# Altium PCB PCB2.PcbDoc
Units mm, origin at the board's own origin, x right, y up, seen from the top; angles counter-clockwise.
Board outline 66.7 x 71.4 mm, 2 copper layers (Top Layer, Bottom Layer); 61 components, 60 nets, 263 pads, 245 vias.
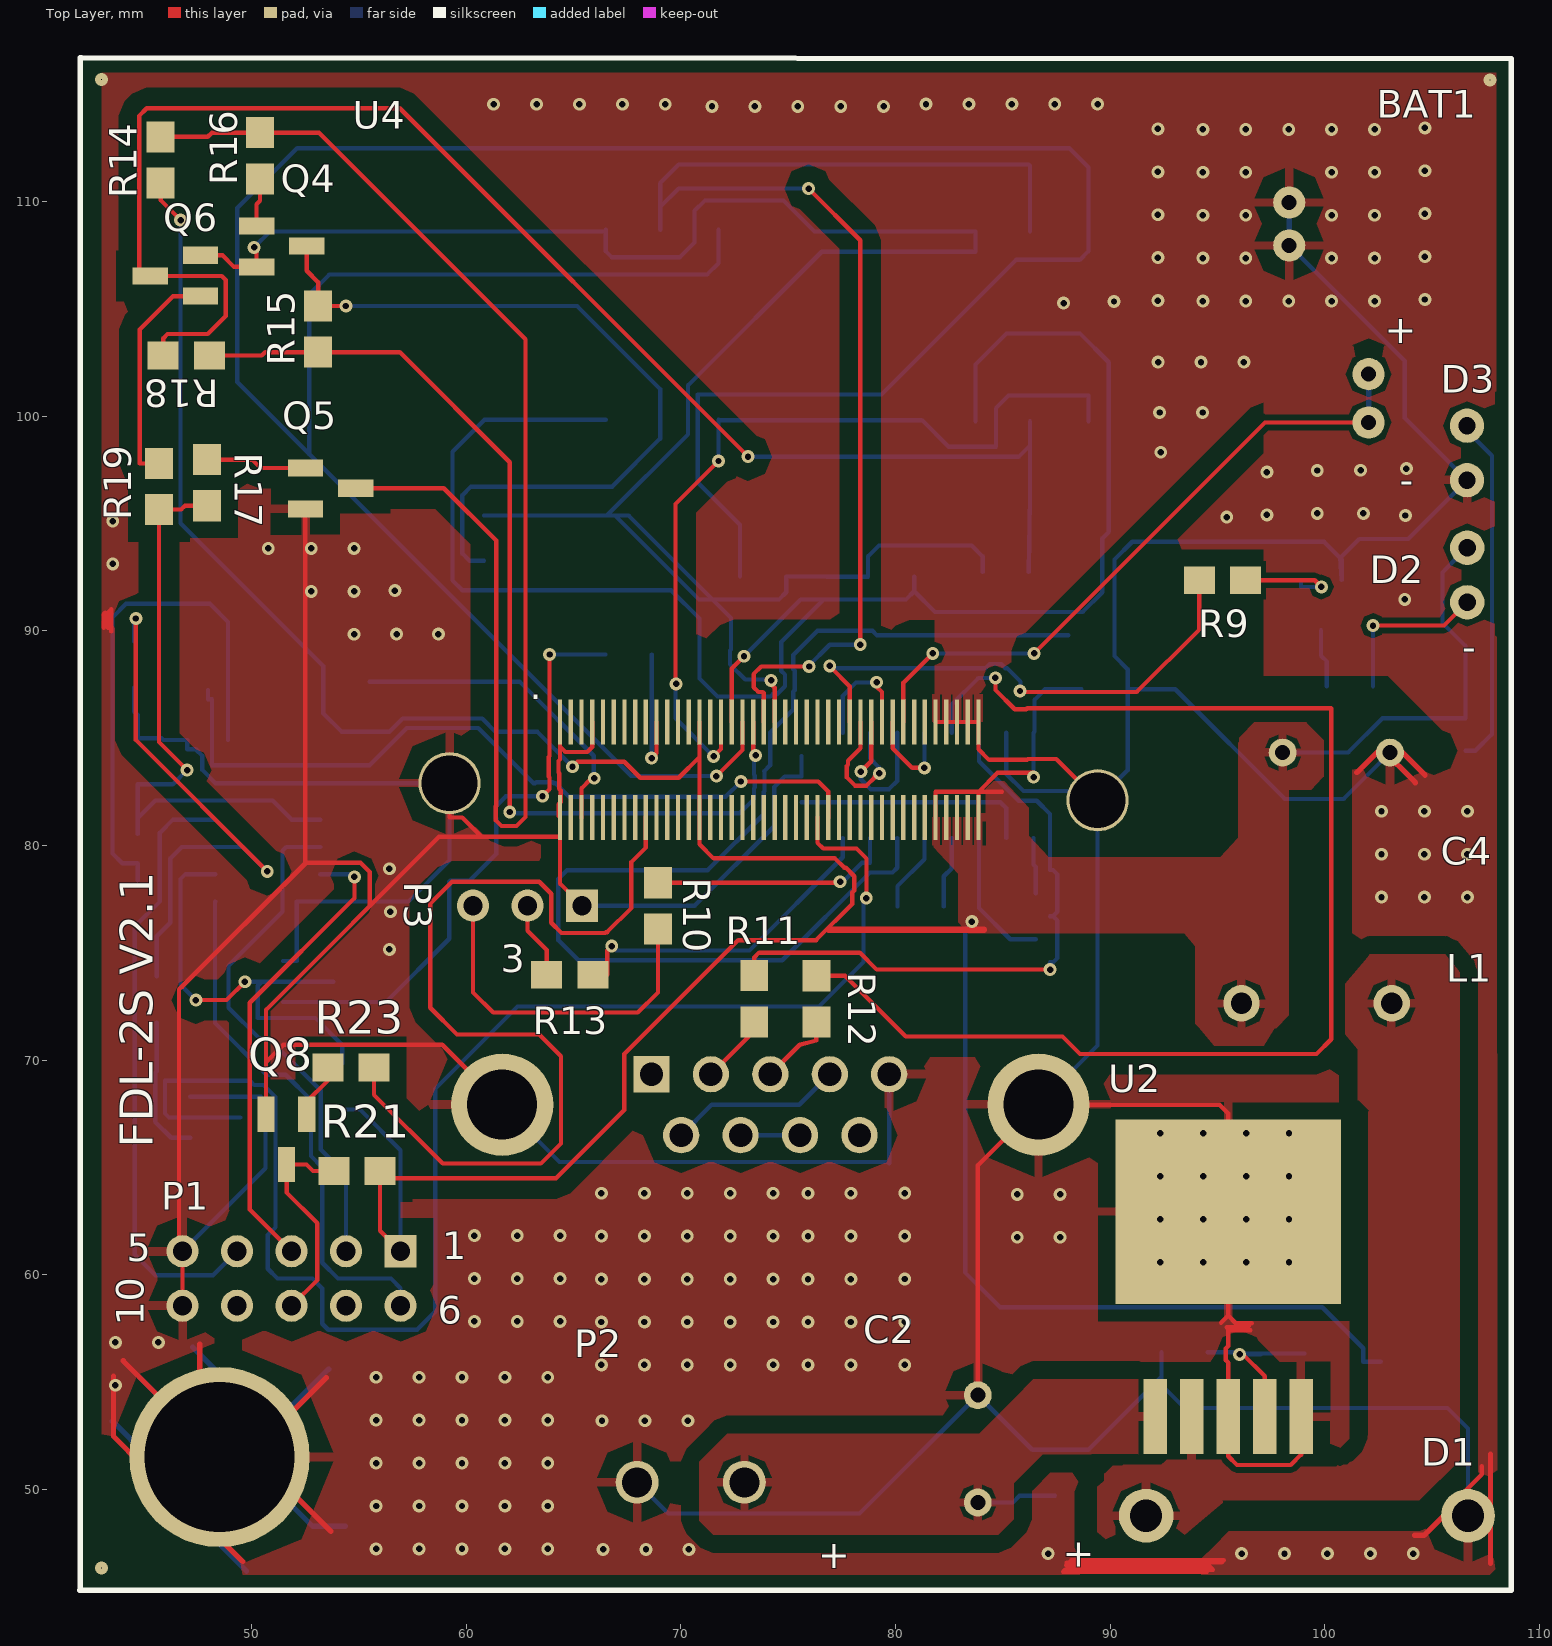
[diagram p0: Top Layer view]
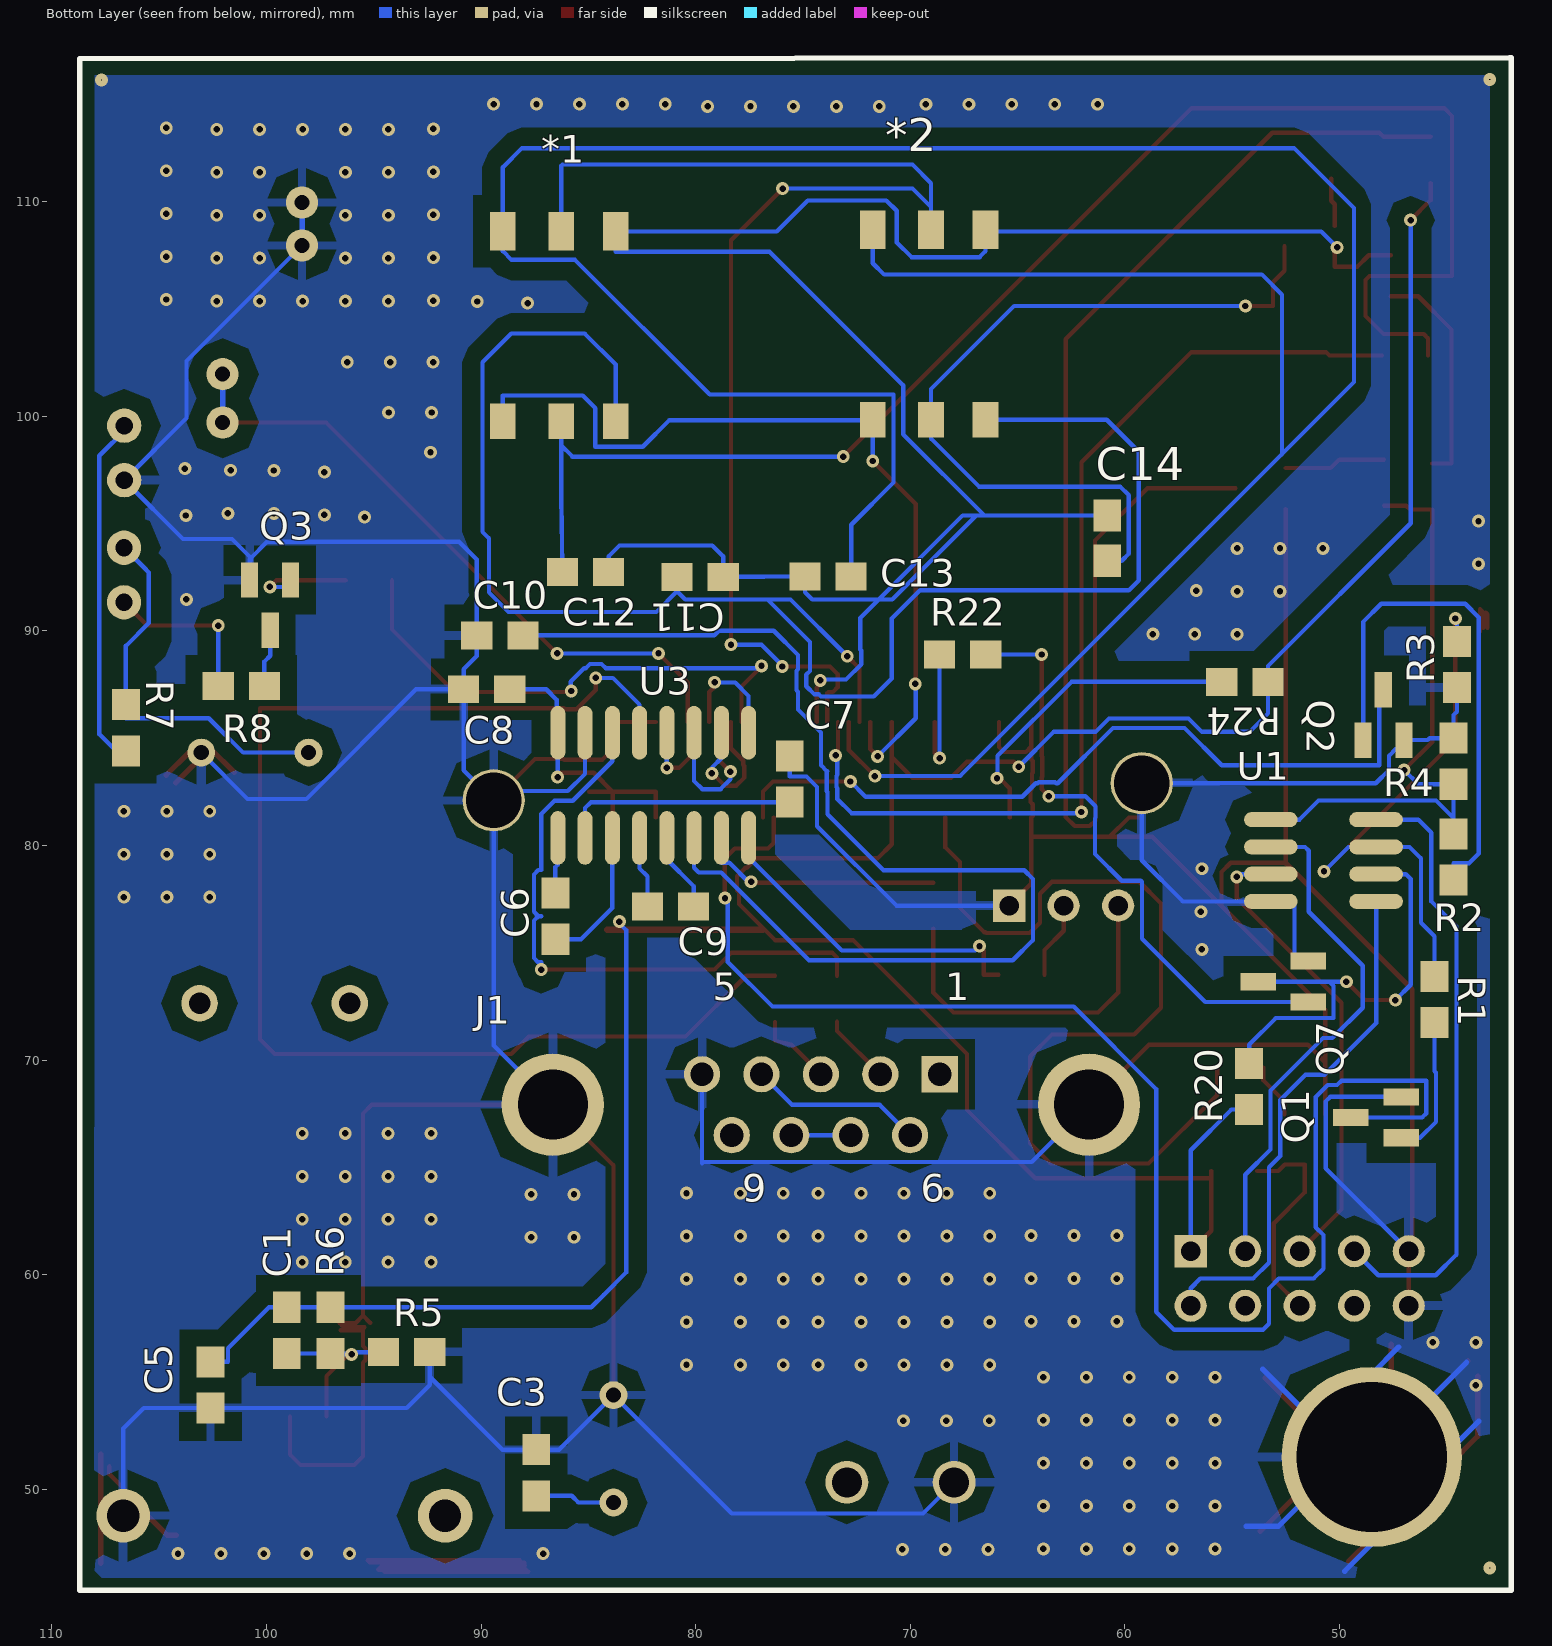
[diagram p1: Bottom Layer view, seen from below]

## Layer stack, top to bottom
Top Layer: signal copper 0.0356
Dielectric: dielectric 0.32, FR-4, Dk 4.8
Bottom Layer: signal copper 0.0356

## Board outline
42,45.323 42,116.702 108.666,116.702 108.7,116.668 108.7,45.3

## Design rules (kind name [scope] priority, off if disabled: settings)
Clearance Clearance_11 [InNamedPolygon('Bootm-GND') Or  InNamedPolygon('Top Layer-GND')] p1: gap=0.6
Clearance Clearance_10 [InNamedPolygon('Top Layer-GND')] p2: gap=0.6
Clearance Clearance_9 [InNamedPolygon('Bootom-GND')] p3: gap=0.6
Clearance Clearance_8 [InNamedPolygon('Top Layer-GND')] p4: gap=0.6
Clearance Clearance_7 [InNamedPolygon('Bottom-GND')] p5: gap=0.6
Clearance Clearance_6 [InNamedPolygon('gnd_top')] p6: gap=0.6
Clearance Clearance_5 [InNamedPolygon('Top Layer-No Net')] p7: gap=0.6
Clearance Clearance_4 [InNamedPolygon('Top Layer-No Net') Or  InNamedPolygon('Top Layer-No Net')] p8: gap=0.6
Clearance Clearance_2 [InNamedPolygon('TopGnd')] p9: gap=0.5
Clearance Clearance_1 [InNamedPolygon('BottomGND')] p10: gap=0.5
Clearance Clearance_3 [InNamedPolygon('Top Layer-No Net') Or  InNamedPolygon('Top Layer-No Net')] p11: gap=0.5
Clearance [All] p12: gap=0.25
PlaneClearance [All] p1: clearance=0.808
PlaneConnect PlaneConnect_1 [InNet('GND')] p1: planeconnectstyle=Direct reliefexpansion=0.508 reliefentries=4 reliefconductorwidth=0.254 reliefairgap=0.254
PlaneConnect [All] p2: planeconnectstyle=Relief reliefexpansion=0.508 reliefentries=4 reliefconductorwidth=0.254 reliefairgap=0.254
PolygonConnect PolygonConnect_2 [All vs IsNamedPolygon('Bottom-GND')] p1: connectstyle=Relief reliefconductorwidth=0.254 reliefentries=4 polygonreliefangle="90 Angle"
PolygonConnect PolygonConnect_1 [All vs IsNamedPolygon('Top Layer-No Net') Or  IsNamedPolygon('Top Layer-No Net')] p2: connectstyle=Relief reliefconductorwidth=0.4 reliefentries=4 polygonreliefangle="90 Angle"
PolygonConnect [All] p3: connectstyle=Relief reliefconductorwidth=0.4 reliefentries=4 polygonreliefangle="90 Angle"
RoutingVias [All] p1: holewidth=0.3 width=0.5 viastyle="Through Hole" minholewidth=0.3 minwidth=0.5 maxholewidth=10.5 maxwidth=10.7
SMDNeckDown [All] p1 off: percent=10.000
SilkToSilkClearance [All] p1: silktosilkclearance=0.1
SilkscreenOverComponentPads [All] p1: minsilkscreentomaskgap=0.254
SolderMaskExpansion [All] p1: expansion=0.102
Width [All] p1: maxlimit=4 minlimit=0.15 preferedwidth=0.2
24 further rules are at their usual default settings.

## Classes and differential pairs
component class 12F629: BAT1 P1 Q1 Q2 R1 R2 R3 R4 U1
component class fonte_nova: C1 C2 C3 C4 C5 D1 D2 D3 L1 P2 Q3 R5 R6 R7 R8 R9 U2
component class MAX3232: C6 C7 C8 C9 C10 J1 P3 R10 R11 R12 R13 U3
component class TC65: R24 U4
component class SIMLOCK: *1 *2 C11 C12 C13 C14 Q4 Q5 Q6 Q7 Q8 R14 R15 R16 R17 R18 R19 R20 R21 R22 R23

## Components (designator, comment, footprint, x,y, rotation, side; value= is the part's Value field where it differs from the comment)
*1 "SIMLOCK2" SIMLOCK_NOVO 87.63,104.191 r0 bottom
*2 "SIMLOCK2" SIMLOCK_NOVO 70.394,104.262 r0 bottom
BAT1 "CR2032V" "BAT-CR2032 V" 100.198,104.963 r90 top
C1 "Cap" 0805L 99.06,57.404 r90 bottom
C2 "Cap2" Capacitor470/35V 83.835,49.383 r90 top
C3 "Cap" 0805L 87.432,50.77 r270 bottom
C4 "Cap2" Capacitor470/35V 98.044,84.328 r0 top
C5 "Cap" 0805L 102.616,54.864 r90 bottom
C6 "Cap" 0805L 86.543,76.703 r90 bottom
C7 "Cap" 0805L 75.621,83.094 r270 bottom
C8 "Cap" 0805L 89.743,87.279 r180 bottom
C9 "Cap" 0805L 81.173,77.16 r0 bottom
C10 "Cap" 0805L 89.131,89.791 r180 bottom
C11 "Cap" 0805L 79.797,92.517 r0 bottom
C12 "Cap" 0805L 85.136,92.74 r0 bottom
C13 "Cap" 0805L 73.833,92.537 r180 bottom
C14 "Cap" 0805 60.823,94.32 r270 bottom
D1 "1N5822" Diode-1N5822 106.68,48.768 r180 top
D2 "LED1" LED-1 106.644,92.603 r0 top
D3 "LED1" LED-1 106.634,98.293 r0 top
J1 "D Connector 9" DB9 74.168,58.42 r0 bottom
L1 "Inductor" "Indutor MCLEOD" 103.124,72.644 r180 top
P1 "Header 5X2A" HDR2X5_CEN 56.937,61.092 r180 top
P2 "Header 2" KRE 67.958,50.325 r0 top
P3 "Header 3" HDR1X3 65.395,77.196 r180 top
Q1 "NPN" SOT-23V2 48.301,67.32 r0 bottom
Q2 "NPN" SOT-23V2 47.96,86.081 r90 bottom
Q3 "NPN" SOT-23V2 99.832,91.201 r270 bottom
Q4 "NPN" SOT-23V2 51.394,107.93 r0 top
Q5 "NPN" SOT-23V2 53.675,96.647 r0 top
Q6 "NPN" SOT-23V2 46.446,106.538 r180 top
Q7 "NPN" SOT-23V2 52.629,73.65 r0 bottom
Q8 "NPN" SOT-23V2 51.628,66.304 r270 top
R1 "Res Semi" 0805L 45.573,72.827 r90 bottom
R2 "Res Semi" 0805L 44.689,79.461 r90 bottom
R3 "Res Semi" 0805L 44.531,88.433 r90 bottom
R4 "Res Semi" 0805L 44.689,83.927 r270 bottom
R5 "Res Semi" 0805L 93.472,56.388 r0 bottom
R6 "Res Semi" 0805L 97.028,57.404 r90 bottom
R7 "Res Semi" 0805L 106.558,85.486 r90 bottom
R8 "Res Semi" 0805L 101.178,87.427 r0 bottom
R9 "Res Semi" 0805L 95.235,92.359 r180 top
R10 "Res Semi" 0805L 68.931,77.191 r270 top
R11 "Res Semi" 0805L 73.416,72.857 r90 top
R12 "Res Semi" 0805L 76.312,72.852 r90 top
R13 "Res Semi" 0805L 64.821,73.975 r180 top
R14 "Res Semi" 0805L 45.756,111.948 r270 top
R15 "Res Semi" 0805L 53.096,104.064 r270 top
R16 "Res Semi" 0805L 50.389,112.141 r270 top
R17 "Res Semi" 0805L 47.925,96.906 r90 top
R18 "Res Semi" 0805L 46.949,102.829 r0 top
R19 "Res Semi" 0805L 45.679,96.728 r90 top
R20 "Res Semi" 0805L 54.214,68.768 r270 bottom
R21 "Res Semi" 0805L 54.905,64.831 r0 top
R22 "Res Semi" 0805L 67.564,88.9 r180 bottom
R23 "Res Semi" 0805L 54.625,69.657 r180 top
R24 "Res Semi" 0805L 54.412,87.625 r180 bottom
U1 "PIC12F629-I/SN" SOIC-SN8_M 50.749,79.299 r0 bottom
U2 "LM2596S-ADJ" TS5B_M 95.504,59.436 r90 top
U3 "MAX3232ESE" NSO16_M 81.984,82.8 r90 bottom
U4 "TC65_SCH" TC65iV3 83.868,122.904 r270 top

## Footprints (in the part's own frame and the unit in brackets; to place one, negate y for a bottom-side part, rotate by r counter-clockwise, add the part's x,y. Pads: shape width x height; smd on the part's side, far side on the other; paste and mask are expansions set on the pad)
0805 [mm] "Chip Resistor, Body 2.0x1.3mm, IPC High Density"
  rect 1.5x1.3 smd: 1(-1.054,0) 2(1.051,0)
  body extent -1.07,-0.7 1.07,0.7, height 2.54
0805L [mm] "Chip Resistor, Body 2.0x1.3mm, IPC High Density"
  rect 1.45x1.3 smd: 1(-1.075,0) 2(1.075,0)
  body extent -1.07,-0.7 1.07,0.7, height 2.54
"BAT-CR2032 V" [mm] "CR 2032 Vertical"
  round 1.5 hole 0.7: 1(3,1.85) 1(5,1.85) 2(-5.25,-1.85) 2(-3,-1.85)
  Bottom Layer lines w0.254: 3,1.85 5,1.85 ; -5.25,-1.85 -3,-1.85
Capacitor470/35V [mm]
  round 1.3 hole 0.7: 1(0,0) 2(5,0)
DB9 [mm] "Connector; D Subminiature; 9 Position; Right Angle; Pitch 1.385 mm"
  rect 1.69x1.69 hole 1.09: 1(-5.54,-10.92)
  round 1.69 hole 1.09: 2(-2.77,-10.92) 3(0,-10.92) 4(2.77,-10.92) 5(5.54,-10.92) 6(-4.155,-8.08) 7(-1.385,-8.08) 8(1.385,-8.08) 9(4.155,-8.08)
  round 4.76 hole 3.26: 10(-12.495,-9.5) 11(12.495,-9.5)
Diode-1N5822 [mm]
  round 2.5 hole 1.5: 1(0,0)
  oval 2.55x2.5 hole 1.5: 2(15,0)
HDR1X3 [mm] "Connector; Header; 3 Position"
  rect 1.5x1.5 hole 0.9: 1(0,0)
  round 1.5 hole 0.9: 2(2.54,0) 3(5.08,0)
HDR2X5_CEN [mm] "Connector; Header; 5x2 Position"
  rect 1.5x1.5 hole 0.9: 1(0,0)
  round 1.5 hole 0.9: 2(2.54,0) 3(5.08,0) 4(7.62,0) 5(10.16,0) 6(0,2.54) 7(2.54,2.54) 8(5.08,2.54) 9(7.62,2.54) 10(10.16,2.54)
"Indutor MCLEOD" [mm]
  round 1.7 hole 1: 1(0,0) 2(7,0)
KRE [mm]
  round 2 hole 1.4: 1(0,0) 2(5,0)
LED-1 [mm] "Typical RED GaAs LED; 2 Leads"
  round 1.6 hole 0.8: 1(0,1.27) 2(0,-1.27)
NSO16_M [mm] "SOIC, 16-Leads, Body 9.9x3.9mm, Pitch 1.27mm, IPC Low Density"
  oval 2.5x0.7 smd: 1(-2.45,4.445) 2(-2.45,3.175) 3(-2.45,1.905) 4(-2.45,0.635) 5(-2.45,-0.635) 6(-2.45,-1.905) 7(-2.45,-3.175) 8(-2.45,-4.445) 9(2.45,-4.445) 10(2.45,-3.175) 11(2.45,-1.905) 12(2.45,-0.635) 13(2.45,0.635) 14(2.45,1.905) 15(2.45,3.175) 16(2.45,4.445)
  body extent -2,-5 2,5, height 1.75
SIMLOCK_NOVO [mm] "Conector para Simcard"
  rect 1.2x1.65 smd: 1(-3.9,4.425) 2(-1.36,4.425) 3(1.36,4.425)
  rect 1.2x1.8 smd: 4(-3.9,-4.425) 5(-1.36,-4.425) 6(1.36,-4.425)
SOIC-SN8_M [mm] "SOIC, 8-Leads, Body 4.9x3.8mm, Pitch 1.27mm, IPC Low Density"
  oval 2.5x0.7 smd: 1(-2.45,1.905) 2(-2.45,0.635) 3(-2.45,-0.635) 4(-2.45,-1.905) 5(2.45,-1.905) 6(2.45,-0.635) 7(2.45,0.635) 8(2.45,1.905)
  body extent -2,-2.5 2,2.5, height 1.75
SOT-23V2 [mm] "SOT23, 3-Leads, Body 2.9x1.3mm, Pitch 0.95mm, Lead Span 2.4mm, IPC Low Density"
  rect 1.65x0.8 smd: B(-1.168,0.94) C(1.168,0) E(-1.168,-0.965)
  body extent -0.7,-1.5 0.7,1.5, height 1.14
TC65iV3 [mm]
  round 2.9 hole 2.6: 0(40,-24.65) 0(40.8,5.55)
  rect 2.1x0.2 smd: 1(37.149,-19.5) 2(37.149,-19) 3(37.149,-18.5) 4(37.149,-18) 5(37.149,-17.5) 6(37.149,-17) 7(37.149,-16.5) 8(37.149,-16) 9(37.149,-15.5) 10(37.149,-15) 11(37.149,-14.5) 12(37.149,-14) 13(37.149,-13.5) 14(37.149,-13) 15(37.149,-12.5) 16(37.149,-12) 17(37.149,-11.5) 18(37.149,-11) 19(37.149,-10.5) 20(37.149,-10) 21(37.149,-9.5) 22(37.149,-9) 23(37.149,-8.5) 24(37.149,-8) 25(37.149,-7.5) 26(37.149,-7) 27(37.149,-6.5) 28(37.149,-6) 29(37.149,-5.5) 30(37.149,-5) 31(37.149,-4.5) 32(37.149,-4) 33(37.149,-3.5) 34(37.149,-3) 35(37.149,-2.5) 36(37.149,-2) 37(37.149,-1.5) 38(37.149,-1) 39(37.149,-0.5) 40(37.149,0) 41(41.6,0) 42(41.6,-0.5) 43(41.6,-1) 44(41.6,-1.5) 45(41.6,-2) 46(41.6,-2.5) 47(41.6,-3) 48(41.6,-3.5) 49(41.6,-4) 50(41.6,-4.5) 51(41.6,-5) 52(41.6,-5.5) 53(41.6,-6) 54(41.6,-6.5) 55(41.6,-7) 56(41.6,-7.5) 57(41.6,-8) 58(41.6,-8.5) 59(41.6,-9) 60(41.6,-9.5) 61(41.6,-10) 62(41.6,-10.5) 63(41.6,-11) 64(41.6,-11.5) 65(41.6,-12) 66(41.6,-12.5) 67(41.6,-13) 68(41.6,-13.5) 69(41.6,-14) 70(41.6,-14.5) 71(41.6,-15) 72(41.6,-15.5) 73(41.6,-16) 74(41.6,-16.5) 75(41.6,-17) 76(41.6,-17.5) 77(41.6,-18) 78(41.6,-18.5) 79(41.6,-19) 80(41.6,-19.5)
TS5B_M [mm] "D2-PAK, 6-Leads, Body 8.6x10.2mm, Pitch 1.7mm, Lead Span 14.1mm, IPC Low Density"
  rect 3.5x1.1 smd: 1(-6.05,3.4) 2(-6.05,1.7) 3(-6.05,0) 4(-6.05,-1.7) 5(-6.05,-3.4)
  rect 8.6x10.5 smd: 6(3.5,0)
  body extent -3.3,-5.2 6.1,5.2, height 4.65

## Part data
C1 C2 C3 C4 C5 C6 C7 C8 C9 C10 C11 C12 C13 C14: "Capacitor"
D1: library part "D Schottky", "Schottky Diode"
D2 D3: "Typical RED GaAs LED"
J1: "Receptacle Assembly, 9 Position, Right Angle"
P1: "Header, 5-Pin, Dual row"
P2: "Header, 2-Pin"
P3: "Header, 3-Pin"
Q1 Q2 Q3 Q4 Q5 Q6 Q7 Q8: "NPN Bipolar Transistor"
R1 R2 R3 R4 R5 R6 R7 R8 R9 R10 R11 R12 R13 R14 R15 R16 R17 R18 R19 R20 R21 R22 R23 R24: "Semiconductor Resistor"
U1: "FLASH-Based 8-Bit CMOS Microcontroller, 8-Pin SOIC 150mil, Industrial Temperature"
U2: "SIMPLE SWITCHER Power Converter 150 KHz 3A Step-Down Voltage Regulator"
U3: "3.0V TO 5.5V, Low-Power, up to 1Mbps, True RS-232 Transceiver Using Four 0.1µF External Capacitor"

## Free pads (board coordinates)
  round 8.4 hole 7: 0(48.5,51.5)

## Via types
v1: diameter 0.6, hole 0.3, Top Layer to Bottom Layer, 242 vias
v2: diameter 0.6, hole 0, Top Layer to Bottom Layer, 3 vias

## Nets (pads, with @x,y where several pads share a name; then routed paths per layer and width w, separated by ;. In a path a pad name is that pad's centre, name@x,y a point inside that pad or via, vN(x,y) a via of type N, cw(c..) or ccw(c..) an arc to the next point about the centre after c; other vN are vias at no path point)
CCCLK: *1.3 *2.3 U4.16 | length 40.4
  Top Layer w0.2: v1(69.774,87.528) 69.774,87.351 69.748,87.325 69.748,95.91 v1(71.754,97.916) ; v1(71.526,84.15) 71.868,84.492 U4.16
  Bottom Layer w0.2: v1(69.774,87.528) 69.774,87.351 69.748,87.325 69.748,85.928 v1(71.526,84.15) ; v1(71.754,97.916) *2.3@71.754,99.822 ; *1.3 88.99,100.965 85.268,100.965 84.684,100.381 84.684,98.577 82.474,98.577 81.229,99.822 *2.3@71.754,99.822 ; *2.3@71.754,99.822 *2.3 *2.3@71.754,99.822
CCGND: *1.4 *2.4 C11.1 C12.1 C13.1 C14.1 Q4.E Q6.E U4.21 | length 107.9
  Top Layer w0.2: Q6.E 48.641,107.503 49.179,106.964 Q4.E 50.226,107.762 v1(50.114,107.874) ; v1@73.99,87.732 74.368,87.354 U4.21 ; v1@74.031,87.691 v1(74.201,87.691)
  Bottom Layer w0.2: v1(50.114,107.874) 50.851,108.61 *2.4@66.494,108.61 ; C14.1 66.548,95.374 ; *2.4 *2.4@66.494,108.61 ; v1(74.201,87.691) 74.031,87.691 73.99,87.732 73,87.732 72.29,88.441 72.29,89.087 72.339,89.136 72.339,90.599 71.473,91.465 ; *1.4 *1.4@83.73,108.61 ; C12.1 84.061,93.472 83.553,93.98 79.23,93.98 78.722,93.472 C11.1 76.805,92.517 76.784,92.537 C13.1 74.908,91.799 74.574,91.465 71.473,91.465 ; *2.4@66.494,108.61 66.494,107.696 66.773,107.417 69.952,107.417 70.637,108.102 70.637,109.576 71.12,110.058 74.778,110.058 76.225,108.61 *1.4@83.73,108.61 ; 66.548,95.374 70.333,99.159 70.333,101.441 76.56,107.668 83.73,107.668 *1.4@83.73,108.61 ; 66.548,95.374 66.932,95.374 ; 66.932,95.374 67.564,95.374 71.473,91.465 ; 66.932,95.374 70.841,91.465 71.473,91.465
CCIN: *1.5 *2.5 U4.20 | length 60.6
  Top Layer w0.2: U4.20 73.868,87.105 73.818,87.155 73.611,87.155 73.39,87.376 73.39,87.986 73.746,88.341 v1(75.971,88.341) ; v1(75.95,110.613) 78.359,108.204 v1(78.359,89.357)
  Bottom Layer w0.2: *2.5 69.034,109.746 ; v1(75.95,110.613) 69.901,110.613 69.034,109.746 ; v1(75.971,88.341) 75.921,88.341 76.937,89.357 v1(78.359,89.357) ; *1.5 86.27,111.672 86.211,111.731 69.901,111.731 69.034,110.864 69.034,109.746
CCIO: *1.6 *2.6 C13.2 U4.18 | length 166.3
  Top Layer w0.2: v1(71.653,83.236) 72.868,84.45 U4.18
  Bottom Layer w0.2: v1(71.653,83.236) 67.691,83.236 ; *2.6 71.754,107.136 71.222,106.604 53.619,106.604 52.68,105.664 52.68,98.247 ; C13.2 72.758,94.945 70.79,96.913 70.79,101.016 79.35,101.016 85.623,107.29 88.584,107.29 88.99,107.696 *1.6 88.99,111.608 88.101,112.497 52.121,112.497 49.327,109.703 49.327,101.6 52.68,98.247 ; 52.68,98.247 67.691,83.236 ; 52.68,98.247 52.68,98.236 67.679,83.236 67.691,83.236
CCRST: R15.2 R18.2 U4.19 | length 47.9
  Top Layer w0.2: R18.2 50.47,102.829 50.629,102.989 R15.2 56.896,102.989 62.027,97.858 v1@62.027,81.509 ; U4.19 73.368,84.315 v1(73.482,84.201)
  Bottom Layer w0.2: v1(62.027,81.559) 62.027,81.509 72.746,81.509 73.406,82.169 73.406,82.672 73.446,82.713 73.446,83.251 73.406,83.291 73.406,84.125 v1(73.482,84.201)
CCRST1: *1.2 C12.2 Q6.C R18.1 | length 74.2
  Top Layer w0.2: R18.1 45.874,103.632 46.078,103.835 47.955,103.835 48.793,104.673 48.793,106.35 48.605,106.538 Q6.C 44.755,106.538 44.755,113.995 45.11,114.351 56.896,114.351 v1(73.127,98.12)
  Bottom Layer w0.2: v1(73.127,98.12) 85.75,98.12 86.27,98.64 ; C12.2 86.27,96.274 86.27,98.64 ; 86.27,98.64 *1.2 86.27,98.64
CCRST2: *2.2 C14.2 Q4.C R15.1 | length 37
  Top Layer w0.2: Q4.C 52.563,106.782 53.096,106.248 R15.1 v1(54.39,105.139)
  Bottom Layer w0.2: v1(54.39,105.139) 65.165,105.139 69.034,101.27 *2.2 69.034,98.958 66.798,96.723 60.223,96.723 59.817,96.317 59.817,93.6 60.147,93.27 C14.2
CCVCC: *1.1 *2.1 C11.2 U4.17 | length 81.8
  Top Layer w0.2: U4.17 72.368,88.245 v1(72.94,88.818)
  Bottom Layer w0.2: *2.1 60.848,99.837 59.36,98.349 59.36,92.354 59.817,91.897 69.545,91.897 70.866,90.576 70.866,87.782 71.704,86.944 74.168,86.944 74.265,87.041 74.47,87.041 74.851,87.422 74.851,87.96 74.676,88.135 74.676,89.484 76.655,91.463 ; v1(72.94,88.818) 75.586,91.463 76.655,91.463 ; C11.2 80.872,91.846 ; *1.1 83.73,102.413 85.178,103.861 88.595,103.861 89.941,102.514 89.941,94.615 89.637,94.31 89.637,91.796 88.722,90.881 81.837,90.881 80.872,91.846 ; 76.655,91.463 80.489,91.463 80.872,91.846
EMERG_RST: Q2.C U4.55 | length 36.2
  Top Layer w0.2: v1(72.796,82.982) 76.403,82.982 76.868,82.517 U4.55
  Bottom Layer w0.2: Q2.C 47.96,86.817 48.15,86.817 48.15,83.737 55.492,83.737 57.226,85.471 60.554,85.471 63.129,82.896 63.206,82.896 63.256,82.946 64.023,82.946 64.073,82.896 64.16,82.896 64.786,82.271 72.085,82.271 v1(72.796,82.982)
GND: BAT1.1 C2.2 C3.1 C4.2 C5.1 C7.1 C8.1 C10.1 D1.1 D3.2 J1.5 J1.10 J1.11 P1.5 P1.10 P2.1 P3.1 pad.0 Q1.E Q2.E Q3.E Q5.E Q7.E Q8.E R3.1 R4.1 R5.1 U1.8 U2.3 U2.5 U2.6 U3.15 U4.0 U4.1 U4.4 U4.36 U4.37 U4.38 U4.39 U4.40 U4.80 | length 506.4
  Top Layer w0.2: 43.104,90.145 43.104,90.78 43.18,90.856 43.18,90.272 43.307,90.145 43.307,90.856 43.459,91.008 43.459,89.967 ; P1.10 P1.5 46.609,61.26 46.609,73.304 52.502,79.197 ; 46.777,73.421 52.502,79.146 52.502,79.197 ; Q8.E 50.663,69.901 ; Q5.E 52.502,95.682 52.502,79.197 ; 55.499,77.175 55.499,78.765 55.067,79.197 52.502,79.197 ; U4.0@59.218,82.904 59.218,81.304 59.813,81.304 60.713,80.404 ; J1.10 58.879,70.714 51.476,70.714 50.663,69.901 ; U4.1 64.368,84.603 ; P3.1 64.368,78.223 U4.80@64.368,80.404 ; U4.4 65.868,84.588 65.634,84.353 64.618,84.353 64.368,84.603 ; U4.36 81.868,85.75 82.368,85.75 U4.37 U4.38 ; C2.2 83.835,65.092 J1.11 95.098,67.92 95.504,67.514 U2.6 95.504,58.09 ; 87.986,46.584 88.087,46.584 ; U4.0@89.418,82.104 87.491,84.031 86.167,84.031 86.124,83.988 84.363,83.988 83.868,84.483 U4.40 U4.39 ; 94.513,46.152 87.808,46.152 87.909,46.253 94.793,46.253 94.59,46.457 87.96,46.457 88.087,46.584 ; 95.174,57.76 95.504,58.09 ; 95.885,57.709 95.885,57.544 ; 96.469,57.607 96.406,57.544 95.885,57.544 ; 96.545,57.404 95.58,57.404 95.504,57.48 ; 96.596,57.734 95.86,57.734 95.504,58.09 ; U2.5 98.904,51.613 98.421,51.13 95.91,51.13 95.504,51.537 U2.3 95.504,55.901 95.387,56.017 95.387,56.556 95.504,56.672 95.504,57.48 ; D1.1@106.325,49.7 107.325,50.7 107.325,51.075 ; 50.663,69.901 50.663,72.339 58.728,80.404 60.713,80.404 ; 60.713,80.404 U4.80@64.368,80.404 ; U4.80@64.368,80.404 U4.80 64.298,81.374 64.298,81.921 64.404,82.027 64.404,82.565 64.331,82.638 64.331,83.365 64.298,83.398 64.298,83.937 64.368,84.007 64.368,84.603 ; U4.38 U4.39 ; U4.38 82.868,85.75 83.368,85.75 U4.39 ; 88.087,46.584 95.199,46.584 95.301,46.685 88.189,46.685 88.087,46.584 ; 95.504,57.48 95.441,57.544 95.885,57.544
  Top Layer w0.25: 43.561,55.275 43.561,52.471 44.917,51.115 47.584,53.782 47.584,56.769 ; 44.013,55.987 pad.0 ; 49.581,46.634 48.5,47.715 pad.0 ; 53.467,55.189 49.778,51.5 pad.0 ; 53.696,48.036 50.232,51.5 pad.0 ; 101.5,83.4 102.625,84.525 104.225,82.925 ; C4.2 103.622,84.328 104.675,83.275 ; 104.2,47.85 104.625,47.85 D1.1@105.575,48.8 ; 107.725,46.55 107.725,51.625
  Bottom Layer w0.2: R3.1 44.531,86.238 44.689,86.081 R4.1 45.796,85.002 45.886,84.912 Q2.E 46.995,84.48 47.396,84.48 47.7,84.177 47.7,83.515 48.311,82.904 59.218,82.904 59.218,79.312 57.3,77.394 U1.8 52.095,77.394 52.095,74.615 Q7.E ; P1.5 50.648,64.963 50.648,68.072 50.434,68.285 Q1.E ; J1.10 64.34,65.253 79.649,65.253 79.708,65.194 J1.5 ; P3.1 70.643,77.196 74.347,80.9 74.347,82.729 74.835,83.217 75.621,83.217 C7.1 ; P2.1 69.413,48.87 78.322,48.87 C2.2 86.373,51.844 C3.1 89.002,51.844 92.397,55.24 ; U3.15 85.159,83.337 85.961,82.535 86.705,82.535 86.713,82.543 88.979,82.543 U4.0@89.418,82.104 ; J1.11 89.418,70.675 U4.0@89.418,82.104 ; R5.1 92.397,55.24 ; BAT1.1@98.348,107.963 103.734,102.577 103.734,99.924 D3.2 103.896,94.285 101.61,94.285 100.729,93.403 ; C4.2 100.885,82.169 98.146,82.169 93.035,87.279 C8.1 ; D1.1 106.68,52.832 105.723,53.789 C5.1 93.472,53.789 92.397,54.864 92.397,55.24 ; U4.0@89.418,82.104 90.818,83.504 C8.1 ; C8.1 90.818,88.214 90.206,88.826 C10.1 90.206,93.33 91.034,94.158 99.974,94.158 100.729,93.403 ; 100.729,93.403 100.797,93.335 Q3.E 100.729,93.403
  Bottom Layer w0.25: 43.505,53.172 45.177,51.5 pad.0 ; 44.084,55.916 pad.0 ; 47.249,56.627 48.5,55.376 pad.0 ; pad.0@49.388,51.73 52.842,48.275 54.361,48.275 ; 49.759,46.182 48.5,47.441 pad.0 ; 53.584,55.596 49.488,51.5 pad.0
  other v1: 87.111,47 96.128,47 98.128,47 100.128,47 102.128,47 104.128,47 66.373,47.194 68.373,47.194 70.373,47.194 55.799,47.219 57.799,47.219 59.799,47.219 61.799,47.219 63.799,47.219 55.799,49.219 57.799,49.219 59.799,49.219 61.799,49.219 63.799,49.219 55.799,51.219 57.799,51.219 59.799,51.219 61.799,51.219 63.799,51.219 66.324,53.194 68.324,53.194 70.324,53.194 55.799,53.219 57.799,53.219 59.799,53.219 61.799,53.219 63.799,53.219 43.649,54.844 55.799,55.219 57.799,55.219 59.799,55.219 61.799,55.219 63.799,55.219 66.299,55.794 68.299,55.794 70.299,55.794 72.299,55.794 74.299,55.794 75.924,55.794 77.924,55.794 80.431,55.799 43.649,56.844 45.649,56.844 66.299,57.794 68.299,57.794 70.299,57.794 72.299,57.794 74.299,57.794 75.924,57.794 77.924,57.794 60.374,57.819 62.374,57.819 64.374,57.819 80.431,57.799 66.299,59.794 68.299,59.794 70.299,59.794 72.299,59.794 74.299,59.794 75.924,59.794 77.924,59.794 80.431,59.799 60.374,59.819 62.374,59.819 64.374,59.819 92.337,60.583 94.337,60.583 96.337,60.583 98.337,60.583 85.674,61.744 87.674,61.744 66.299,61.794 68.299,61.794 70.299,61.794 72.299,61.794 74.299,61.794 75.924,61.794 77.924,61.794 80.431,61.799 60.374,61.819 62.374,61.819 64.374,61.819 92.337,62.583 94.337,62.583 96.337,62.583 98.337,62.583 85.674,63.744 87.674,63.744 66.299,63.794 68.299,63.794 70.299,63.794 72.299,63.794 74.299,63.794 75.924,63.794 77.924,63.794 80.431,63.799 92.337,64.583 94.337,64.583 96.337,64.583 98.337,64.583 92.337,66.583 94.337,66.583 96.337,66.583 98.337,66.583 56.413,75.159 56.464,76.911 102.649,77.594 104.649,77.594 106.649,77.594 56.413,78.918 102.649,79.594 104.649,79.594 106.649,79.594 102.649,81.594 104.649,81.594 106.649,81.594 54.774,89.844 56.75,89.85 58.7,89.85 103.734,91.465 52.774,91.844 54.774,91.844 56.675,91.875 43.524,93.119 50.774,93.844 52.774,93.844 54.774,93.844 43.524,95.119 95.435,95.3 103.759,95.377 97.307,95.402 99.656,95.474 101.803,95.479 97.307,97.402 99.656,97.474 101.676,97.485 103.81,97.561 92.361,98.323 92.31,100.177 94.31,100.177 92.238,102.527 94.238,102.527 96.238,102.527 87.833,105.276 90.182,105.348 94.324,105.37 96.324,105.37 98.324,105.37 100.324,105.37 102.324,105.37 92.228,105.391 104.674,105.442 94.324,107.37 96.324,107.37 100.324,107.37 102.324,107.37 92.228,107.391 104.674,107.442 94.324,109.37 96.324,109.37 100.324,109.37 102.324,109.37 92.228,109.391 104.674,109.442 92.228,111.391 94.324,111.37 96.324,111.37 100.324,111.37 102.324,111.37 104.674,111.442 94.324,113.37 96.324,113.37 98.324,113.37 100.324,113.37 102.324,113.37 92.228,113.391 104.674,113.442 71.449,114.444 73.449,114.444 75.449,114.444 77.449,114.444 79.449,114.444 61.274,114.544 63.274,114.544 65.274,114.544 67.274,114.544 69.274,114.544 81.422,114.55 83.422,114.55 85.422,114.55 87.422,114.55 89.422,114.55
  other v2: 107.7,115.668 43,115.702
GP0: P1.3 U1.7 | length 22
  Top Layer w0.2: P1.3 49.911,63.038 49.911,72.669 54.788,77.546 v1@54.788,78.588
  Bottom Layer w0.2: U1.7 54.712,78.664 54.788,78.588 v1(54.788,78.537)
GP0P1: P1.8 Q8.C R21.1 | length 10
  Top Layer w0.2: P1.8 53.061,59.756 53.061,62.398 51.628,63.83 Q8.C 52.553,65.136 52.857,64.831 R21.1
GP1: P1.2 U1.6 | length 24.1
  Bottom Layer w0.2: U1.6 51.613,79.934 51.435,79.756 51.435,76.911 48.92,74.397 48.92,72.441 50.337,71.025 50.768,71.025 53.214,68.579 53.214,65.837 54.397,64.654 P1.2
GP2: R2.2 R4.2 R17.1 R19.1 U1.5 | length 29.9
  Top Layer w0.2: v1(46.99,83.515) 45.679,84.826 R19.1 46.711,95.653 46.888,95.831 R17.1
  Bottom Layer w0.2: v1(46.99,83.515) 46.327,82.852 R4.2 44.689,81.28 ; U1.5 51.867,81.204 50.978,82.093 45.502,82.093 44.689,81.28 ; 44.689,81.28 R2.2 44.689,81.28
GP3: P1.4 U1.4 | length 28.6
  Bottom Layer w0.2: U1.4 46.33,81.204 45.72,80.594 45.72,77.394 44.552,76.225 44.552,60.935 45.517,59.969 48.194,59.969 P1.4
GP4: R1.2 R3.2 U1.3 | length 26.4
  Top Layer w0.2: v1(44.602,90.576) 44.602,84.912 v1(50.724,78.791)
  Bottom Layer w0.2: R3.2 44.531,90.505 v1(44.602,90.576) ; R1.2 45.573,75.773 46.203,76.403 46.203,79.4 46.736,79.934 U1.3 49.581,79.934 v1(50.724,78.791)
GP5: Q7.C R20.1 U1.2 | length 21.5
  Top Layer w0.2: v1(47.396,72.796) 48.829,72.796 v1(49.682,73.65)
  Bottom Layer w0.2: v1(47.396,72.796) 46.685,73.508 46.685,78.435 46.914,78.664 U1.2 ; v1(49.682,73.65) 50.475,73.65 ; Q7.C 50.475,73.65 ; R20.1 54.214,70.714 52.967,71.96 50.285,71.96 50.285,73.46 50.475,73.65
GPIO2: R23.1 U4.72 | length 44.2
  Top Layer w0.2: R23.1 55.7,68.379 58.903,65.176 63.475,65.176 64.414,66.116 64.414,70.18 63.398,71.196 59.563,71.196 58.318,72.441 58.318,77.292 59.334,78.308 63.398,78.308 63.955,77.752 63.955,76.403 64.437,75.921 66.467,75.921 66.507,75.961 66.563,75.961 67.691,77.089 67.691,79.231 68.368,79.908 U4.72
GPIO5: R22.1 U4.10 | length 6.6
  Top Layer w0.2: v1(68.639,84.074) 68.868,84.304 U4.10
  Bottom Layer w0.2: v1(68.639,84.074) R22.1
IGT: Q1.C U4.56 | length 70.3
  Top Layer w0.2: U4.56 76.368,80.121 76.632,79.858 78.181,79.858 78.651,79.388 v1@78.651,77.66
  Bottom Layer w0.2: Q1.C 46.15,67.32 45.957,67.513 45.957,69.037 49.911,69.037 50.114,68.834 50.546,68.834 51.105,68.275 51.105,62.205 50.749,61.849 50.749,60.274 51.206,59.817 52.832,59.817 53.289,59.36 53.289,57.709 53.569,57.429 57.709,57.429 58.547,58.268 58.547,68.655 62.384,72.492 76.429,72.492 78.511,74.574 v1@78.511,77.521
  other v1: 78.638,77.546
NetC1_1: C1.1 R5.2 R6.1 U2.4 | length 9
  Top Layer w0.2: v1(96.037,56.286) 96.188,56.286 97.204,55.27 U2.4
  Bottom Layer w0.2: R5.2 95.758,56.388 95.817,56.329 96.037,56.329 R6.1 ; v1(96.037,56.286) 97.028,56.286 R6.1 ; C1.1 R6.1
NetC2_1: C2.1 C3.2 P2.2 U2.1 | length 3.7
  Bottom Layer w0.2: C2.1 85.471,49.383 85.783,49.695 C3.2
NetC6_1: C6.1 U3.3 | length 6.5
  Bottom Layer w0.2: U3.3 83.889,77.083 85.344,75.628 C6.1
NetC6_2: C6.2 U3.1 | length 2.6
  Bottom Layer w0.2: U3.1 86.429,79.108 86.543,78.994 C6.2
NetC7_2: C7.2 U3.2 | length 11
  Bottom Layer w0.2: C7.2 84.885,82.019 85.159,81.744 U3.2
NetC9_1: C9.1 U3.5 | length 3.7
  Bottom Layer w0.2: C9.1 80.098,78.105 81.349,79.356 U3.5
NetC9_2: C9.2 U3.4 | length 3.3
  Bottom Layer w0.2: C9.2 82.248,78.562 82.619,78.933 U3.4
NetC10_2: C10.2 U3.6 | length 54.5
  Bottom Layer w0.2: U3.6 80.079,78.961 79.858,78.74 78.816,78.74 74.727,74.651 65.227,74.651 64.287,75.59 64.287,78.435 64.694,78.842 71.247,78.842 73.863,81.458 73.863,82.493 73.896,82.526 73.896,83.437 73.879,83.455 74.168,83.744 74.168,85.268 75.235,86.335 75.235,87.169 75.301,87.236 75.301,88.147 75.235,88.213 75.235,88.875 76.367,90.007 78.927,90.007 79.143,89.791 C10.2
NetD1_2: D1.2 L1.1 U2.2
NetD2_2: D2.2 R8.2 | length 7.7
  Top Layer w0.2: v1(102.253,90.246) 105.557,90.246 D2.2
  Bottom Layer w0.2: R8.2 v1(102.253,90.246)
NetD3_1: D3.1 R7.1 | length 16.4
  Bottom Layer w0.2: R7.1 107.017,84.411 107.794,85.188 107.794,98.163 106.558,99.399 106.558,99.446 D3.1@106.604,99.492
NetJ1_2: J1.2 R11.1 | length 3.3
  Top Layer w0.2: J1.2 73.416,71.358 R11.1
NetJ1_3: J1.3 R12.1 | length 3.6
  Top Layer w0.2: J1.3 75.542,70.714 76.312,70.917 R12.1
NetJ1_4: J1.4 J1.6 | length 8.1
  Bottom Layer w0.2: J1.6 71.433,67.92 75.518,67.92 J1.4
NetJ1_7: J1.7 J1.8 | length 2.8
  Bottom Layer w0.2: J1.7 J1.8
NetP3_2: P3.2 R13.2 | length 3.6
  Top Layer w0.2: P3.2 62.855,76.024 63.746,75.133 R13.2
NetP3_3: P3.3 R10.2 | length 16.4
  Top Layer w0.2: P3.3 60.315,73.152 61.255,72.212 67.991,72.212 68.931,73.152 R10.2
NetQ1_B: Q1.B R1.1 | length 6.6
  Bottom Layer w0.2: R1.1 45.573,69.485 45.507,69.42 45.507,67.121 46.248,66.38 Q1.B
NetQ2_B: Q2.B R2.1 | length 24.7
  Bottom Layer w0.2: R2.1 44.689,79.172 43.967,79.172 43.51,79.629 43.51,90.627 44.145,91.262 48.057,91.262 48.9,90.419 Q2.B
NetQ3_B: Q3.B R9.1 | length 4.9
  Top Layer w0.2: R9.1 99.538,92.359 v1(99.847,92.05)
  Bottom Layer w0.2: Q3.B 98.892,92.05 v1(99.847,92.05)
NetQ3_C: Q3.C R8.1 | length 2.7
  Bottom Layer w0.2: Q3.C 99.832,88.841 100.103,88.57 R8.1
NetQ4_B: Q4.B R16.2 | length 2.3
  Top Layer w0.2: Q4.B 50.226,109.88 50.389,110.043 R16.2
NetQ5_B: Q5.B R17.2 | length 4.7
  Top Layer w0.2: R17.2 50.013,97.981 50.407,97.587 Q5.B
NetQ5_C: Q5.C R14.1 R16.1 | length 65.6
  Top Layer w0.2: R14.1 47.955,113.023 48.148,113.216 R16.1 53.137,113.216 62.763,103.589 62.763,81.331 62.341,80.909 61.636,80.909 61.377,81.168 61.377,81.829 61.392,81.844 61.392,94.209 58.953,96.647 Q5.C
NetQ6_B: Q6.B R19.2 | length 10.6
  Top Layer w0.2: R19.2 44.78,97.803 44.78,104.049 46.33,105.598 Q6.B
NetQ7_B: Q7.B R22.2 | length 28
  Top Layer w0.2: v1@63.754,82.499 63.881,82.626 63.881,83.179 63.848,83.212 63.848,84.123 63.881,84.156 v1(63.881,88.9)
  Bottom Layer w0.2: Q7.B 56.261,72.71 59.207,75.656 59.207,78.308 59.258,78.359 60.147,78.359 61.392,79.604 61.392,81.275 61.377,81.29 61.377,81.829 61.844,82.296 v1(63.551,82.296) ; v1(63.881,88.9) R22.2
NetQ8_B: Q8.B R23.2 | length 2.6
  Top Layer w0.2: Q8.B 52.568,68.072 53.55,69.054 R23.2
NetR10_1: R10.1 U3.7 | length 11.6
  Top Layer w0.2: R10.1 77.461,78.266 77.461,78.308 v1(77.419,78.308)
  Bottom Layer w0.2: v1(77.419,78.308) 77.461,78.308 77.504,78.266 78.435,79.197 78.809,79.197 U3.7
NetR11_2: R11.2 U3.14 | length 28.9
  Top Layer w0.2: R11.2 73.416,74.778 73.645,75.006 78.334,75.006 79.121,74.219 v1(87.203,74.219)
  Bottom Layer w0.2: U3.14 83.889,83.929 85.733,82.085 86.584,82.085 87.198,81.471 87.198,78.853 87.338,78.853 87.543,78.648 87.543,76.908 87.338,76.703 ; v1@87.198,74.219 87.198,74.553 87.338,74.553 87.543,74.758 87.543,76.498 87.338,76.703 ; 87.338,76.703 87.198,76.703 87.338,76.703
NetR12_2: R12.2 U3.13 | length 61.7
  Top Layer w0.2: R12.2 77.648,73.927 80.48,71.095 87.782,71.095 88.595,70.282 99.619,70.282 100.305,70.968 100.305,86.385 100.295,86.395 86.146,86.395 86.096,86.345 85.557,86.345 84.658,87.244 v1(84.658,87.808)
  Bottom Layer w0.2: U3.13 82.619,86.563 83.864,87.808 v1(84.658,87.808)
NetR13_1: R13.1 U3.8 | length 15.6
  Top Layer w0.2: R13.1 66.573,73.975 66.573,75.108 v1(66.777,75.311)
  Bottom Layer w0.2: v1(66.777,75.311) 66.98,75.108 73.196,75.108 77.539,79.451 U3.8
PWR_IND: R24.1 U4.78 | length 15.4
  Top Layer w0.2: U4.78 65.368,82.662 65.774,83.068 65.861,82.982 v1@65.964,82.982
  Bottom Layer w0.2: R24.1 62.496,87.625 65.938,84.182 65.938,83.232 65.774,83.068 65.861,82.982 v1@65.964,82.982
  other v1: 65.964,83.134
RXD0: U3.11 U4.30 | length 7.2
  Top Layer w0.2: v1(78.384,83.439) 78.868,83.923 U4.30
  Bottom Layer w0.2: v1(78.384,83.439) 78.384,83.083 78.842,82.626 79.701,82.626 80.079,83.004 U3.11
RXD1: U3.10 U4.29 | length 6.9
  Top Layer w0.2: U4.29 78.368,84.531 77.784,83.948 77.784,83.758 77.734,83.708 77.734,83.17 78.115,82.789 78.654,82.789 79.034,83.17 79.034,83.233 79.215,83.414 79.248,83.381 v1(79.248,83.363)
  Bottom Layer w0.2: U3.10 78.809,84.062 79.215,83.656 79.215,83.414 79.248,83.381 v1(79.248,83.363)
SYNC: R9.2 U4.28 | length 26
  Top Layer w0.2: v1(76.937,88.367) 76.86,88.367 76.759,88.265 77.013,88.265 77.868,87.41 U4.28 ; v1(85.801,87.198) 85.801,87.02 85.827,86.995 85.979,87.147 91.239,87.147 94.16,90.068 R9.2
  Bottom Layer w0.2: v1(76.937,88.367) 76.86,88.367 76.759,88.265 84.196,88.265 84.389,88.458 84.927,88.458 85.12,88.265 85.198,88.265 85.827,87.636 85.827,86.995 85.801,87.02 v1(85.801,87.198)
TXD0: U3.12 U4.32 | length 4.7
  Top Layer w0.2: U4.32 79.868,84.531 80.782,83.617 v1(81.349,83.617)
  Bottom Layer w0.2: v1(81.349,83.617) U3.12
TXD1: U3.9 U4.31 | length 5.6
  Top Layer w0.2: v1@79.17,87.494 79.096,87.42 79.368,87.147 U4.31
  Bottom Layer w0.2: U3.9 77.539,86.97 78.162,87.592 78.923,87.592 79.096,87.42 v1@79.17,87.494
  other v1: 79.121,87.605
VCC: C1.2 C4.1 C5.2 C8.2 D2.1 L1.2 P1.1 R6.2 R7.2 R14.2 R20.2 R21.2 R24.2 U3.16 U4.14 U4.41 U4.42 U4.43 U4.44 U4.45 U4.67 | length 183.5
  Top Layer w0.2: R14.2 45.756,110.073 v1(46.685,109.144) ; R21.2 R21.2@55.98,64.491 ; P1.1 55.98,62.049 R21.2@55.98,64.491 ; v1(64.948,83.668) 65.184,83.903 67.361,83.903 68.105,83.16 69.901,83.16 70.868,84.127 ; U4.14 70.868,84.127 ; U4.45 81.868,82.499 83.868,82.499 ; U4.41 83.868,82.499 ; 84.963,82.499 83.868,82.499 ; v1(86.436,83.185) 86.436,83.381 86.429,83.388 84.757,83.388 83.868,82.499 ; R21.2@55.98,64.491 64.177,64.491 67.361,67.674 67.361,70.282 72.669,75.59 76.302,75.59 77.988,77.277 77.988,77.815 78.08,77.907 78.08,78.567 77.688,78.958 77.618,78.958 77.176,79.4 71.526,79.4 70.868,80.059 U4.67 70.868,84.127
  Top Layer w0.3: 76.886,76.073 84.125,76.073
  Bottom Layer w0.2: v1(46.685,109.144) 46.685,95.018 53.337,88.367 R24.2 53.337,86.157 54.201,85.293 56.412,85.293 57.04,85.921 60.74,85.921 61.368,85.293 63.322,85.293 v1(64.948,83.668) ; R20.2 55.042,67.693 56.937,65.798 P1.1 ; v1@83.652,76.53 83.652,76.465 83.246,76.059 83.246,60.101 84.282,59.065 ; 84.156,59.191 84.282,59.065 ; v1(86.436,83.185) 86.436,83.381 86.429,83.388 U3.16 86.477,85.298 86.477,86.786 86.97,87.279 C8.2 ; C4.1 101.094,84.328 102.694,85.928 106.558,85.928 106.558,89.301 105.494,90.365 105.494,92.718 D2.1@106.578,93.802 ; C5.2 101.795,55.939 101.795,56.574 99.89,58.479 C1.2 R6.2 84.868,58.479 84.282,59.065 ; 105.606,92.855 D2.1@106.756,94.005
  other v1: 83.561,76.454
VCC_12F: P1.6 U1.1 | length 24.4
  Bottom Layer w0.2: U1.1 48.285,77.394 48.285,71.73 50.701,69.314 51.591,69.314 52.764,68.141 52.764,65.533 53.289,65.008 53.289,60.554 54.026,59.817 56.49,59.817 56.937,59.37 P1.6
VDDLP: BAT1.2 U4.33 | length 28.5
  Top Layer w0.2: U4.33 80.368,87.582 v1(81.737,88.951) ; v1(86.462,88.951) 97.224,99.713 BAT1.2@102.048,99.713
  Bottom Layer w0.2: v1(81.737,88.951) v1(86.462,88.951)
pads on no net: J1.1 J1.9 P1.7 P1.9 U4.2 U4.3 U4.5 U4.6 U4.7 U4.8 U4.9 U4.11 U4.12 U4.13 U4.15 U4.22 U4.23 U4.24 U4.25 U4.26 U4.27 U4.34 U4.35 U4.46 U4.47 U4.48 U4.49 U4.50 U4.51 U4.52 U4.53 U4.54 U4.57 U4.58 U4.59 U4.60 U4.61 U4.62 U4.63 U4.64 U4.65 U4.66 U4.68 U4.69 U4.70 U4.71 U4.73 U4.74 U4.75 U4.76 U4.77 U4.79
copper on no net:
  other v2: 43,46.323

## Polygon pours and split planes (outlines as drawn)
GND on Top Layer "TOP-GND-TC65" (solid, remove dead copper, pour order 1001): 107.925,87.884 107.925,103.276 94.208,103.276 94.031,103.429 97.158,100.736 97.158,87.909
GND on Top Layer "TOP-GND-TC65" (solid, remove dead copper, pour order 1000): 85.395,89.332 85.395,87.097 84.251,86.157 84.189,86.208 81.839,86.208 81.839,91.491 82.241,91.821
GND on Top Layer "Top Layer-GND" (solid, remove dead copper, pour order 1001): 108.036,45.979 108.011,46.004 43.002,46.004 43.002,116.017 42.977,116.042 43.002,116.017 107.996,116.017
NetD1_2 on Top Layer "d11" (solid, remove dead copper, pour order 1002): 93.369,52.359 93.369,52.111 92.737,51.491 92.339,51.1 90.459,51.1 90.13,51.1 89.846,50.822 89.738,50.716 89.738,48.502 89.738,47.579 90.24,47.086 90.26,47.066 92.009,47.066 92.86,47.066 93.658,47.849 93.658,48.945 94.214,49.492 104.41,49.492 106.3,51.347 106.3,73.075 106.238,73.075 105.168,74.125 102.489,74.125 102.438,74.125 101.55,73.254 101.55,68.13 101.579,68.13 102.075,67.643 102.023,67.592 102.023,52.519 100.531,51.054 95.557,51.054 95.557,51.063 94.237,52.359
VCC on Top Layer "vcc" (solid, remove dead copper, pour order 1003): 97.755,71.476 98.318,72.081 98.318,84.492 97.755,85.097 97.755,85.4 96.535,85.4 95.972,84.795 95.972,80.355 95.955,80.337 95.127,79.447 87.149,79.447 86.21,80.456 86.21,81.768 85.06,83.004 82.244,83.004 82.078,82.825 81.775,82.499 81.775,79.926 82.925,78.69 82.925,76.42 83.16,76.168 83.394,75.915 95.127,75.915 95.955,75.025 95.972,75.007 95.972,74.402 95.69,74.099 95.033,74.099 94.001,72.989 94.001,71.98 94.47,71.476 94.482,71.488 96.864,71.488
VCC on Top Layer "vcc" (solid, remove dead copper, pour order 1004): 99.36,82.602 99.37,82.602 99.898,83.151 99.954,83.21 99.954,84.768 99.954,84.895 99.217,85.661 99.131,85.75 96.784,85.75 96.723,85.75 96.078,85.08 96.027,85.027 96.027,83.833 96.027,83.569 96.987,82.57
VCC on Top Layer "vcc" (solid, remove dead copper, pour order 1005): 97.16,70.658 97.152,70.666 94.925,70.666 94.845,70.666 94.121,71.52 93.966,71.702 93.966,75.191 93.966,75.303 92.807,76.668 96.574,76.668 96.634,76.738 98.318,76.738 98.318,72.514 98.238,72.42
NetD1_2 on Top Layer "d12" (solid, remove dead copper, pour order 1006): 101.525,70.521 100.965,71.195 100.965,72.192 100.965,73.555 102.001,74.803 102.103,74.925 105.09,74.925 105.608,74.925 106.228,74.179 106.294,74.099 106.294,71.275
NetD1_2 on Top Layer "d12" (solid, remove dead copper, pour order 1007): 95.24,49.433 95.24,49.366 94.251,48.529 92.792,47.295 90.647,47.295 90.24,47.295 89.437,47.974 89.408,47.999 89.408,50 89.408,50.116 89.819,50.464 90.613,51.136 92.94,51.136
NetC2_1 on Top Layer "c11" (solid, remove dead copper, pour order 1008): 92.131,51.638 90.835,51.638 89.129,51.638 89.124,51.633 87.493,51.633 86.863,51.633 85.822,50.592 85.512,50.282 85.512,48.656 85.512,48.611 84.933,48.031 84.79,47.889 80.117,47.889 71.506,47.889 70.866,48.529 70.856,48.539 70.856,51.211 70.856,51.278 71.694,52.116 72.172,52.593 75.733,52.593 83.896,52.593 85.501,54.199 86.421,55.118 92.009,55.118
GND on Bottom Layer "Bootm-GND" (solid, remove dead copper, pour order 1000): 108.036,45.847 108.011,45.872 43.002,45.872 43.002,115.885 42.977,115.91 43.002,115.885 107.996,115.885

## Silkscreen, mask and mechanical layers (free items; w line width, h text height)
Top Overlay:
  lines w0.254: 41.993,45.3 108.7,45.3 108.7,45.6 108.7,116.668 ; 42,45.323 42,116.702 ; 42.069,116.702 108.696,116.668
  text "-" at 103.5,96.4 h1.3
  text "-" at 106.4,88.6 h1.3
  text "3" at 61.61,74.092 h1.3
  text "FDL-2S V2.1" at 45.381,65.911 h1.52 r90
  text "+" at 87.8,46.4 h1.3
  text "+" at 76.411,46.316 h1.3
Bottom Overlay:
  lines w0.254: 41.993,45.3 108.7,45.3 108.7,45.6 108.7,116.668 ; 42,45.323 42,116.702 ; 42.069,116.702 108.696,116.668

## Text inside footprints (layer, text, board x,y; h text height)
BAT1: Top Overlay "+" at 102.8,103.4 h1.3
J1: Bottom Overlay "6" at 69.513,63.395 h1.3; Bottom Overlay "9" at 77.823,63.395 h1.3; Bottom Overlay "5" at 79.208,72.795 h1.3; Bottom Overlay "1" at 68.378,72.795 h1.3
P1: Top Overlay "1" at 58.875,60.718 h1.3; Top Overlay "5" at 44.175,60.618 h1.3; Top Overlay "10" at 44.975,57.618 h1.3 r90; Top Overlay "6" at 58.675,57.718 h1.3